# Altium PCB DEV BOARD PCB.PcbDoc (part 1 of 2)
Units mil, origin at the board's own origin, x right, y up, seen from the top; angles counter-clockwise.
Board outline 4844 x 4603 mil, 2 copper layers (Top Layer, Bottom Layer); 78 components, 97 nets, 348 pads, 240 vias.
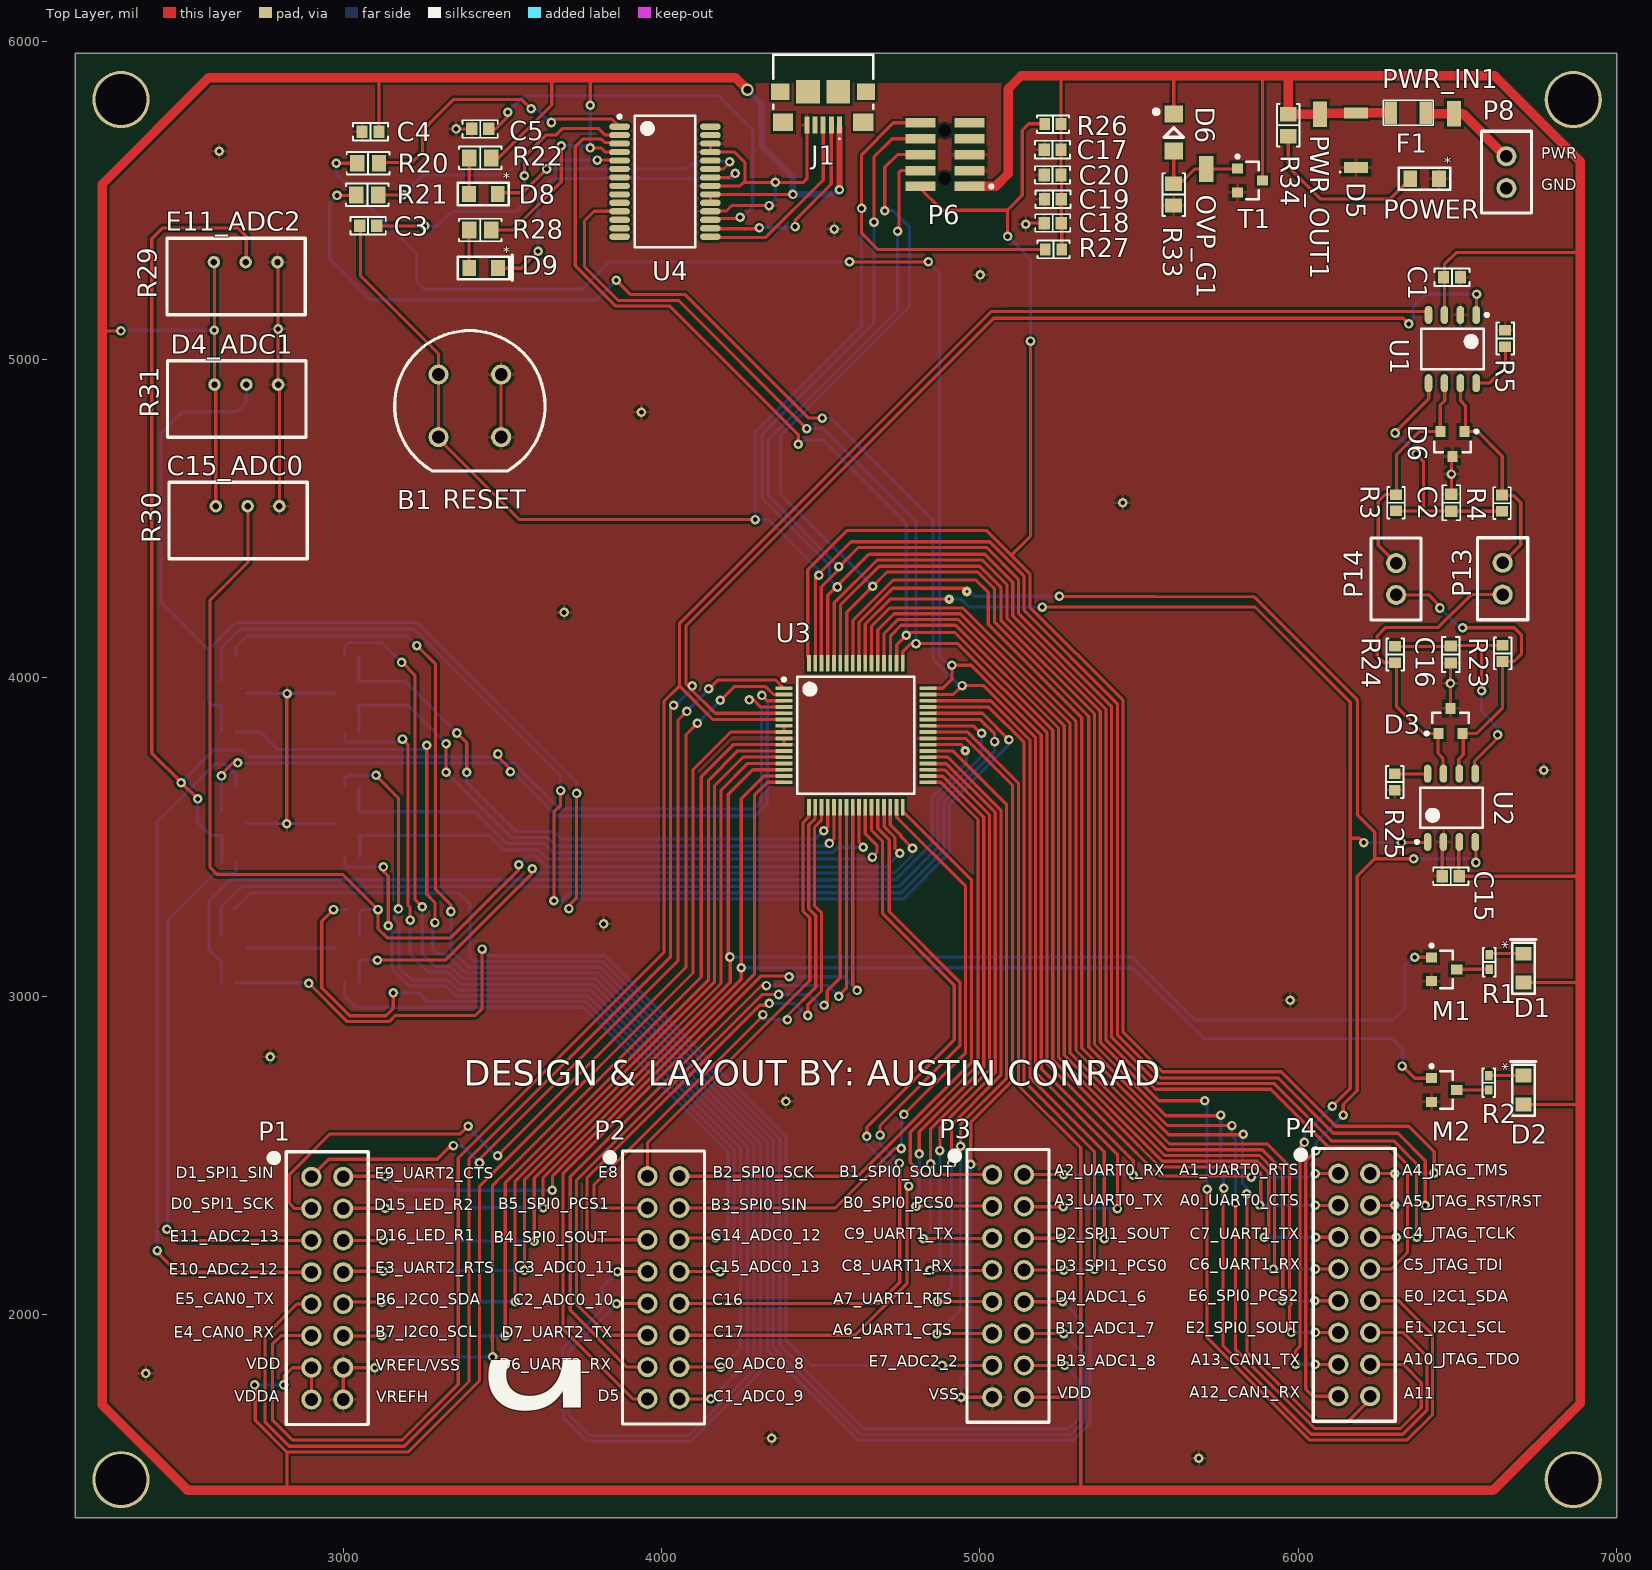
[diagram p0: Top Layer view]
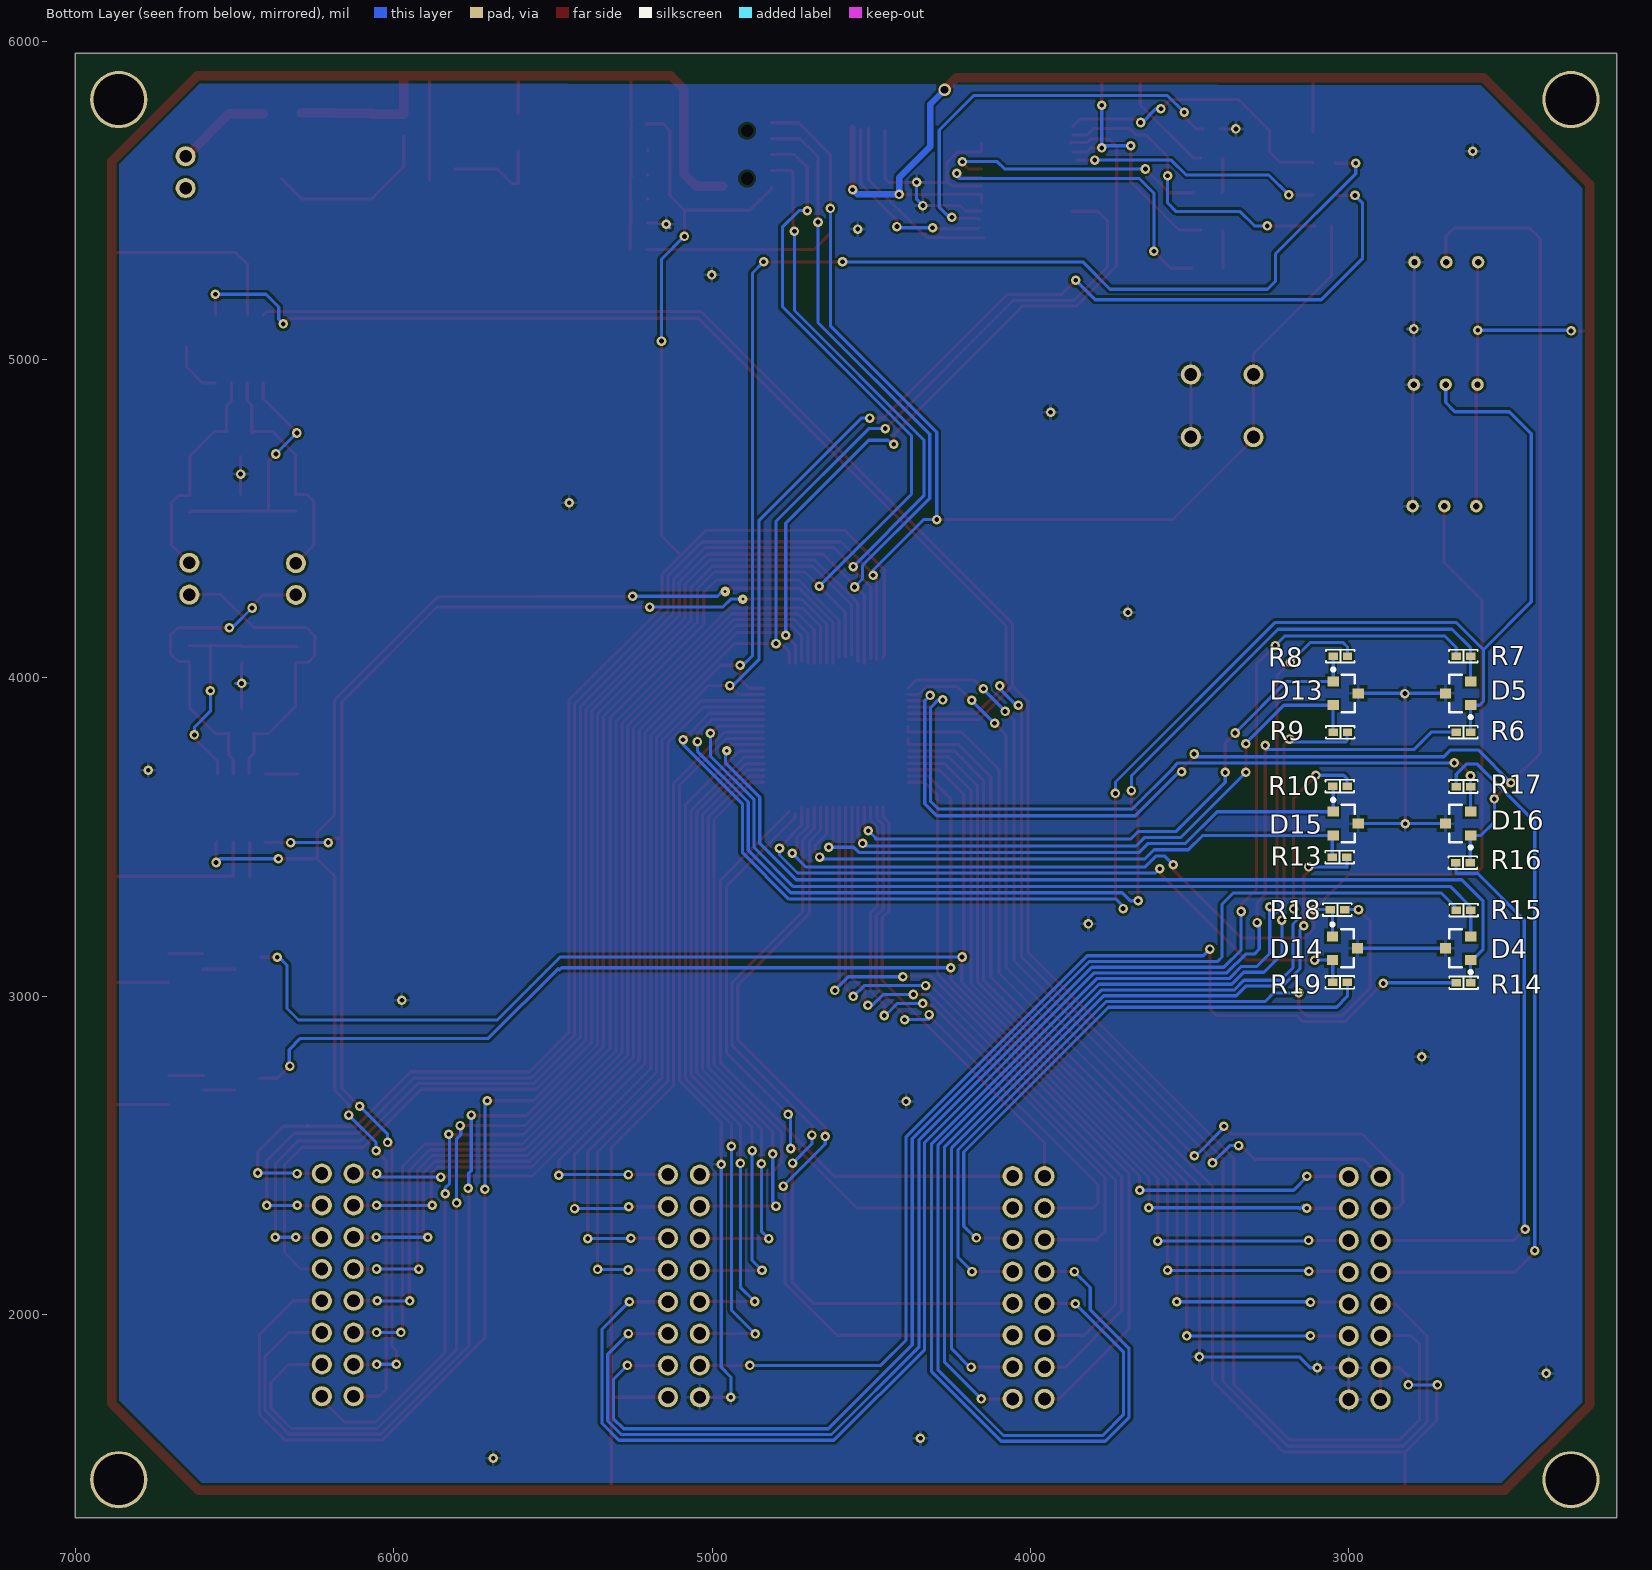
[diagram p1: Bottom Layer view, seen from below]

## Layer stack, top to bottom
Top Solder: solder mask 0.4, Solder Resist, Dk 3.5
Top Layer: signal copper 1.4
Dielectric 1: dielectric 12.6, FR-4, Dk 4.8
Bottom Layer: signal copper 1.4
Bottom Solder: solder mask 0.4, Solder Resist, Dk 3.5

## Board outline
2157,1360 7001,1360 7001,5963 2157,5963
cut-out: 1720,8231
cut-out: 6271.66,2594.85

## Design rules (kind name [scope] priority, off if disabled: settings)
Clearance [All] p1: gap=8 ignorepadtopadclearanceinfootprint=FALSE
PolygonConnect [All] p1: connectstyle=Relief reliefconductorwidth=10 reliefentries=4 polygonreliefangle="90 Angle" airgapwidth=10
RoutingVias [All] p1: holewidth=15 width=30 viastyle="Through Hole" minholewidth=15 minwidth=15 maxholewidth=30 maxwidth=50
SolderMaskExpansion [All] p1: expansion=4
Width [All] p1: maxlimit=60 minlimit=10 preferedwidth=10 minimp=50.000000 maximp=50.000000 favimp=50.000000 checkconnectedcopper=TRUE
30 further rules are at their usual default settings.

## Classes and differential pairs
component class U_RVP_OVP_LC: D5 D6 OVP_G1 POWER PWR_IN1 PWR_OUT1 R33 R34 T1
component class U_MCU_MKE185F512VLH16: B1 C3 C4 C5 C17 C18 C19 C20 D8 D9 J1 P6 P8 R20 R21 R22 R26 R27 R28 R29 R30 R31 U3 U4
component class U_HVP_ADC_CONNECTIONS: D4 D5 D13 D14 D15 D16 R6 R7 R8 R9 R10 R13 R14 R15 R16 R17 R18 R19
component class "U_Header Pinout": P1 P2 P3 P4
component class U_CAN_Tranceiver: C1 C2 C15 C16 D3 D6 P13 P14 R3 R4 R5 R23 R24 R25 U1 U2
component class "DEV Board": D1 D2 F1 M1 M2 R1 R2

## Components (designator, comment, footprint, x,y, rotation, side; value= is the part's Value field where it differs from the comment)
B1 "KS-01Q-01" KS-01Q-01 3298.15,4757.15 r0 top value=NULL
C1 "Capacitor MLCC 0.10uf 50V CAP 0603/1608" "CAP 0603/1608" 6484,5260 r180 top value=0.10uf
C2 "Capacitor MLCC 4700pf 50V CAP 0603/1608" "CAP 0603/1608" 6482.07,4550.78 r270 top value=4700pf
C3 "Capacitor MLCC 0.10uf 25V CAP 0603/1608" "CAP 0603/1608" 3077.03,5421.02 r180 top value=0.10uf
C4 "Capacitor MLCC 0.10uf 25V CAP 0603/1608" "CAP 0603/1608" 3084.55,5717.24 r0 top value=0.10uf
C5 "Capacitor MLCC 0.10uf 25V CAP 0603/1608" "CAP 0603/1608" 3429.15,5725.7 r0 top value=0.10uf
C15 "Capacitor MLCC 0.10uf 50V CAP 0603/1608" "CAP 0603/1608" 6480.07,3376.78 r0 top value=0.10uf
C16 "Capacitor MLCC 4700pf 50V CAP 0603/1608" "CAP 0603/1608" 6480.07,4073.78 r90 top value=4700pf
C17 "Capacitor MLCC 0.10uf 16V CAP 0603/1608" "CAP 0603/1608" 5228.43,5661 r0 top value=0.10uf
C18 "Capacitor MLCC 0.10uf 25V CAP 0603/1608" "CAP 0603/1608" 5228.96,5430.08 r0 top value=0.10uf
C19 "Capacitor MLCC 100pf 25V CAP 0603/1608" "CAP 0603/1608" 5229.44,5504.46 r0 top value=100pf
C20 "Capacitor MLCC 0.10uf 25V CAP 0603/1608" "CAP 0603/1608" 5228.43,5581 r0 top value=0.10uf
D1 "LED" 0805_LED 6708.47,3088.18 r90 top value=Red
D2 "LED" 0805_LED 6708.47,2704.95 r90 top value=Red
D3 "NUP1105LT1G" "SOT-23 (TO-236)" 6479,3865 r90 top value=TVS_24V
D4 "AZ23C4V7-7-F Dual Zenner Diodes" SOT23-3 2654.94,3150.42 r0 bottom value=4.7V
D5 "DIODE" SOD-128 6182,5690 r90 top value=5A
D5 "AZ23C4V7-7-F Dual Zenner Diodes" SOT23-3 2654.94,3951.86 r0 bottom value=4.7V
D6 "DDZ9701-7" SOD123F 5609,5714.93 r90 top value=14Vz
D6 "NUP1105LT1G" "SOT-23 (TO-236)" 6485.6,4735.63 r270 top value=TVS_24V
D8 "LED" 0805_LED 3439.3,5521.24 r0 top value=Green
D9 "LED" 0805_LED 3439.72,5289 r0 top value=Red
D13 "AZ23C4V7-7-F Dual Zenner Diodes" SOT23-3 3008.16,3951.86 r180 bottom value=4.7V
D14 "AZ23C4V7-7-F Dual Zenner Diodes" SOT23-3 3010.69,3150.42 r180 bottom value=4.7V
D15 "AZ23C4V7-7-F Dual Zenner Diodes" SOT23-3 3008.16,3542.21 r180 bottom value=4.7V
D16 "AZ23C4V7-7-F Dual Zenner Diodes" SOT23-3 2654.94,3542.21 r0 bottom value=4.7V
F1 "2.2A" "PTC Fuse 1206/3216" 6346.12,5776 r180 top
J1 "1981568-1" TECO-1981568-5_V 4507.24,5737.69 r180 top value=CONN
M1 "DMG2302UK-7" SOT23-3 6459,3084.24 r0 top value=N_Channel
M2 "DMG2302UK-7" SOT23-3 6459,2704.95 r0 top value=N_Channel
OVP_G1 "RCU-0C" RCU-0C 5712,5600 r180 top
P1 "PPTC082LFBN-RC" PPTC082LFBN-RC 2898.53,2432.09 r270 top value=CONN
P2 "PPTC082LFBN-RC" PPTC082LFBN-RC 3955.06,2433.96 r270 top value=CONN
P3 "PPTC082LFBN-RC" PPTC082LFBN-RC 5038.54,2439.06 r270 top value=CONN
P4 "PPTC082LFBN-RC" PPTC082LFBN-RC 6126.66,2442.29 r270 top value=CONN
P6 "5103309-1" HDR2X5_SMT 4890,5645 r90 top value=CONN
P8 "M20-9990246" M20-9990246 6655,5540 r270 top value=CONN
P13 "M20-9990246" M20-9990246 6643,4262 r270 top value=CONN
P14 "M20-9990246" M20-9990246 6308,4261 r270 top value=CONN
POWER "LED" 0805_LED 6398,5569 r0 top value=Green (schematic designator POWER1)
PWR_IN1 "RCU-0C" RCU-0C 6490,5774 r180 top
PWR_OUT1 "RCU-0C" RCU-0C 6069,5772 r180 top
R1 "Resistor 220 0402 1/10W 1%" "RES 0402/1005" 6600.99,3106.88 r90 top value=220
R2 "Resistor 220 0402 1/10W 1%" "RES 0402/1005" 6599.44,2727.59 r90 top value=220
R3 "Resistor 62 0603 1/10W 5%" "RES 0603/1608" 6307.7,4550.78 r270 top value=62
R4 "Resistor 62 0603 1/10W 5%" "RES 0603/1608" 6641.07,4549.37 r90 top value=62
R5 "Resistor 100 0603 1/10W 10%" "RES 0603/1608" 6651,5067 r270 top value=100
R6 "Resistor 2.2k 0402 1/10W 1%" "RES 0402/1005" 2638.31,3829.86 r0 bottom value=2.2k
R7 "Resistor 2.2k 0402 1/10W 1%" "RES 0402/1005" 2638.31,4068.86 r0 bottom value=2.2k
R8 "Resistor 2.2k 0402 1/10W 1%" "RES 0402/1005" 3025.16,4068.86 r180 bottom value=2.2k
R9 "Resistor 2.2k 0402 1/10W 1%" "RES 0402/1005" 3025.16,3828.86 r180 bottom value=2.2k
R10 "Resistor 2.2k 0402 1/10W 1%" "RES 0402/1005" 3026.64,3660 r180 bottom value=2.2k
R13 "Resistor 2.2k 0402 1/10W 1%" "RES 0402/1005" 3027.64,3437 r180 bottom value=2.2k
R14 "Resistor 2.2k 0402 1/10W 1%" "RES 0402/1005" 2637.67,3041.95 r0 bottom value=2.2k
R15 "Resistor 2.2k 0402 1/10W 1%" "RES 0402/1005" 2637.67,3270.42 r0 bottom value=2.2k
R16 "Resistor 2.2k 0402 1/10W 1%" "RES 0402/1005" 2639.64,3419.82 r0 bottom value=2.2k
R17 "Resistor 2.2k 0402 1/10W 1%" "RES 0402/1005" 2638.2,3658.82 r0 bottom value=2.2k
R18 "Resistor 2.2k 0402 1/10W 1%" "RES 0402/1005" 3034.43,3272.02 r180 bottom value=2.2k
R19 "Resistor 2.2k 0402 1/10W 1%" "RES 0402/1005" 3026.29,3043.05 r180 bottom value=2.2k
R20 "Resistor 1.0k 0805 1/4W 1%" "RES 0805/2012" 3076.68,5617.87 r180 top value=1.0k
R21 "Resistor 1.0k 0805 1/4W 1%" "RES 0805/2012" 3074.59,5518.49 r180 top value=1.0k
R22 "Resistor 1.0k 0805 1/4W 1%" "RES 0805/2012" 3429.15,5634.71 r0 top value=1.0k
R23 "Resistor 62 0603 1/10W 5%" "RES 0603/1608" 6643,4077.41 r90 top value=62
R24 "Resistor 62 0603 1/10W 5%" "RES 0603/1608" 6305.07,4073.78 r270 top value=62
R25 "Resistor 100 0603 1/10W 10%" "RES 0603/1608" 6304,3673 r90 top value=100
R26 "Resistor 10k 0603 1/10W 1%" "RES 0603/1608" 5229.41,5741 r0 top value=10k
R27 "Resistor 10k 0603 1/10W 5%" "RES 0603/1608" 5231.4,5346.98 r0 top value=10k
R28 "Resistor 1.0k 0805 1/4W 1%" "RES 0805/2012" 3429.15,5408.16 r0 top value=1.0k
R29 "3299X-1-502LF" 3299X-1-502LF 2692,5307 r270 top value=5K
R30 "3299X-1-502LF" 3299X-1-502LF 2698,4540 r270 top value=5K
R31 "3299X-1-502LF" 3299X-1-502LF 2694,4922 r270 top value=5K
R33 "Resistor 47k 0805 1/10W 1%" "RES 0805/2012" 5609,5519.55 r90 top value=47k
R34 "Resistor 470 0805 1/10W 1%" "RES 0805/2012" 5969,5737.55 r90 top value=470
T1 "DMG2302UK-7" SOT23-3 5849,5564 r0 top value=N_Channel
U1 "MCP2561 CAN Transceiver" SOIC-8 6485,5034 r270 top value=CAN/UART
U2 "MCP2561 CAN Transceiver" SOIC-8 6482,3592 r90 top value=CAN/UART
U3 "MKE18F512 VLH16 MCU" TQFP64 4610,3820 r0 top
U4 "FT232RL" SSOP-28 4010,5560 r0 top

## Footprints (in the part's own frame and the unit in brackets; to place one, negate y for a bottom-side part, rotate by r counter-clockwise, add the part's x,y. Pads: shape width x height; smd on the part's side, far side on the other; paste and mask are expansions set on the pad)
0805_LED [mm]
  rect 1.1x1.3 smd: 1(-1.15,0) 2(1.15,0)
  silkscreen extent -2.06,-1.02 2.29,1.02, body extent -1.05,-0.67 1.05,0.68, height 0.9
3299X-1-502LF [mm]
  round 1 hole 0.51: 1(0,-2.54) 2(0,0) 3(0,2.54)
  silkscreen extent -1.91,-6.29 4.19,4.76, body extent -1.91,-6.29 4.19,4.76, height 10.05
"CAP 0603/1608" [mm] "Chip Capacitor, 2-Leads, Body 1.60x0.80mm, IPC Medium Density"
  rect 0.9x1 smd: 1(-0.675,0) 2(0.675,0)
  silkscreen extent -1.4,-0.7 1.4,0.7, body extent -0.8,-0.41 0.8,0.41, height 0.82
HDR2X5_SMT [mm] "Header, 10-Leads, Body 3.43x6.35mm, Pitch 1.27mm"
  rect 0.76x2.4 smd: 1(-2.54,-1.95) 2(-2.54,1.95) 3(-1.27,-1.95) 4(-1.27,1.95) 5(0,-1.95) 6(0,1.95) 7(1.27,-1.95) 8(1.27,1.95) 9(2.54,-1.95) 10(2.54,1.95)
  round 0 hole 1 unplated: MH1(-1.905,0) MH2(1.905,0)
  silkscreen extent -2.66,-3.83 -2.42,-3.58, body extent -3.17,-1.72 3.17,1.72, height 4.55
KS-01Q-01 [mm]
  round 1.6 hole 1.02: 1(0,0) 2(5,0) 3(0,5) 4(5,5)
  silkscreen extent -3.5,-2.7 8.5,8.5, body extent -3.5,-3.5 8,8.5, height 14.36
M20-9990246 [mm]
  round 1.6 hole 1: 1(-2.54,0) 2(0,0)
  silkscreen extent -4.54,-2 2,2
PPTC082LFBN-RC [mm] "2x8 header female"
  round 1.6 hole 1.02: 1(0,0) 2(2.54,0) 3(5.08,0) 4(7.62,0) 5(10.16,0) 6(12.7,0) 7(15.24,0) 8(17.78,0) 9(17.78,2.54) 10(15.24,2.54) 11(12.7,2.54) 12(10.16,2.54) 13(7.62,2.54) 14(5.08,2.54) 15(2.54,2.54) 16(0,2.54)
  silkscreen extent -2,-3.07 19.78,4.54, body extent -1.3,-1.2 19.52,3.8, height 8.5
"PTC Fuse 1206/3216" [mm]
  rect 1x1.8 smd: 1(-1.4,0) 2(1.4,0)
  silkscreen extent -2,-1 2,1, body extent -1.75,-1 1.75,1, height 1
RCU-0C [mm]
  rect 1.15x2.05 smd: 1(0,0)
  body extent -0.6,-0.77 0.6,0.82, height 1.16
"RES 0402/1005" [mm] "Chip Resistor, 2-Leads, Body 1.0x0.5mm, IPC Medium Density"
  rect 0.75x0.6 smd: 1(-0.575,0) 2(0.575,0)
  silkscreen extent -1.14,-0.51 1.14,0.51, body extent -0.5,-0.25 0.5,0.25, height 0.35
"RES 0603/1608" [mm] "Chip Resistor, 2-Leads, Body 1.60x0.80mm, IPC Medium Density"
  rect 0.85x0.95 smd: 1(-0.65,0) 2(0.65,0)
  silkscreen extent -1.27,-0.7 1.27,0.7, body extent -0.8,-0.4 0.8,0.4, height 0.45
"RES 0805/2012" [mm] "Chip Resistor, 2-Leads, Body 2.00x1.25mm, IPC Medium Density"
  rect 1.15x1.35 smd: 1(-0.875,0) 2(0.875,0)
  silkscreen extent -1.7,-0.9 1.7,0.9, body extent -0.95,-0.62 1.05,0.63, height 0.6
SOD123F [mm] "SODFL, 2-Leads, Body 1.80x3.50mm, IPC Low Density"
  rect 1.35x1.45 smd: 1(-1.475,0) 2(1.475,0)
  silkscreen extent -0.38,-0.76 1.75,1.5, body extent -1.75,-0.95 1.75,0.95, height 1.15
SOD-128 [mm] "SOD-128, 2-Leads, Body 2.40x4.70mm, IPC Medium Density"
  rect 0.9x1.9 smd: 1(-2.175,0) 2(2.175,0)
  silkscreen extent -2.57,1.2 -2.48,1.3, body extent -2.35,-1.25 2.35,1.25, height 0.85
SOIC-8 [mm] "SOIC, 8-Leads, Body 4.90x3.90mm, Pitch 1.27mm, IPC Medium Density"
  oval 1.45x0.6 smd: 1(-2.725,1.905) 2(-2.725,0.635) 3(-2.725,-0.635) 4(-2.725,-1.905) 5(2.725,-1.905) 6(2.725,-0.635) 7(2.725,0.635) 8(2.725,1.905)
  silkscreen extent -2.85,-2.5 1.6,2.88, body extent -3,-2.5 3,2.5, height 1.75
SOT23-3 [mm] "SOT23, 3-Leads, Body 2.92x2.37mm, Pitch 0.95mm, IPC Medium Density, NUP2105L"
  rect 0.9x0.8 smd: 1(-1,0.95) 2(-1,-0.95) 3(1,0)
  silkscreen extent -1.12,-1.5 0.7,2.02, body extent -0.7,-1.52 0.7,1.52, height 1.11
"SOT-23 (TO-236)" [mm]
  rect 0.9x0.8 smd: 1(-1,0.95) 2(-1,-0.95) 3(1,0)
  silkscreen extent -1.12,-1.46 0.65,2.02, body extent -0.65,-1.46 0.65,1.46, height 1.11
SSOP-28 [mm] "SOP68P780X200-28N ,SOP, 28-Leads, Body 10.20x5.30mm, Pitch 0.68mm, IPC Medium Density, FT232RL"
  oval 1.65x0.5 smd: 1(-3.625,4.394) 2(-3.625,3.718) 3(-3.625,3.042) 4(-3.625,2.366) 5(-3.625,1.69) 6(-3.625,1.014) 7(-3.625,0.338) 8(-3.625,-0.338) 9(-3.625,-1.014) 10(-3.625,-1.69) 11(-3.625,-2.366) 12(-3.625,-3.042) 13(-3.625,-3.718) 14(-3.625,-4.394) 15(3.625,-4.394) 16(3.625,-3.718) 17(3.625,-3.042) 18(3.625,-2.366) 19(3.625,-1.69) 20(3.625,-1.014) 21(3.625,-0.338) 22(3.625,0.338) 23(3.625,1.014) 24(3.625,1.69) 25(3.625,2.366) 26(3.625,3.042) 27(3.625,3.718) 28(3.625,4.394)
  silkscreen extent -3.75,-5.25 2.4,5.32, body extent -2.8,-5.25 2.8,5.25, height 2
TECO-1981568-5_V [mm] "SMD, 5-Leads, Body 8x5.9mm, Pitch 0.65mm"
  rect 0.4x1.35 smd: 1(-1.3,0) 2(-0.65,0) 3(0,0) 4(0.65,0) 5(1.3,0)
  rect 1.6x1.4 smd: 6(-3.2,-0.225) 7(3.2,-0.225)
  rect 1.45x1.3 smd: 8(-3.425,-2.675) 9(3.425,-2.675)
  rect 1.9x1.9 smd: 10(-1.2,-2.675) 11(1.2,-2.675)
  silkscreen extent -4,-5.63 4,1.12, body extent -4,-5.5 4,0.1, height 2.79
TQFP64 [mm] "TSQFP, 64-Leads, Body 10.00x10.00mm, Pitch 0.50mm, IPC Medium Density, MKE18F512VLH16"
  rect 1.35x0.3 smd: 1(-5.75,3.75) 2(-5.75,3.25) 3(-5.75,2.75) 4(-5.75,2.25) 5(-5.75,1.75) 6(-5.75,1.25) 7(-5.75,0.75) 8(-5.75,0.25) 9(-5.75,-0.25) 10(-5.75,-0.75) 11(-5.75,-1.25) 12(-5.75,-1.75) 13(-5.75,-2.25) 14(-5.75,-2.75) 15(-5.75,-3.25) 16(-5.75,-3.75) 33(5.75,-3.75) 34(5.75,-3.25) 35(5.75,-2.75) 36(5.75,-2.25) 37(5.75,-1.75) 38(5.75,-1.25) 39(5.75,-0.75) 40(5.75,-0.25) 41(5.75,0.25) 42(5.75,0.75) 43(5.75,1.25) 44(5.75,1.75) 45(5.75,2.25) 46(5.75,2.75) 47(5.75,3.25) 48(5.75,3.75)
  rect 0.3x1.35 smd: 17(-3.75,-5.75) 18(-3.25,-5.75) 19(-2.75,-5.75) 20(-2.25,-5.75) 21(-1.75,-5.75) 22(-1.25,-5.75) 23(-0.75,-5.75) 24(-0.25,-5.75) 25(0.25,-5.75) 26(0.75,-5.75) 27(1.25,-5.75) 28(1.75,-5.75) 29(2.25,-5.75) 30(2.75,-5.75) 31(3.25,-5.75) 32(3.75,-5.75) 49(3.75,5.75) 50(3.25,5.75) 51(2.75,5.75) 52(2.25,5.75) 53(1.75,5.75) 54(1.25,5.75) 55(0.75,5.75) 56(0.25,5.75) 57(-0.25,5.75) 58(-0.75,5.75) 59(-1.25,5.75) 60(-1.75,5.75) 61(-2.25,5.75) 62(-2.75,5.75) 63(-3.25,5.75) 64(-3.75,5.75)
  silkscreen extent -5.87,-4.67 4.67,4.68, body extent -5,-5 5,5, height 1.6

## Part data
B1: library part 7, "RESET button", Manufacturer_id=1, Package=NULL, Supplier1PartNo=EG4791-ND, Voltage_Rating=Null, ComponentLink1Description=null, ComponentLink1URL=Null, Created_By=Austin, Created_Date=12/15/2018, Drawer_id=1, idTable=7, Link=https://www.digikey.com/product-detail/en/e-switch/KS-01Q-01/EG4791-ND/2116270, MfrPartNo=KS-01Q-01, Name=KS-01Q-01, Num_Contacts=4, Num_Rows=2, Pitch=5, Supplier1=e-switch, Updated_By=Null
C1 C15: library part 943, Dielectric=Ceramic, Manufacturer_id=1, Package="CAP 0603/1608", Voltage_Rating=50V, Created_By="Nick Mah", Created_Date=10/20/2018, Drawer_id=1, idCapacitor=943, Name="Cap_0.10uf_50V_CAP 0603/1608"
C2 C16: library part 929, Dielectric=Ceramic, Manufacturer_id=1, Package="CAP 0603/1608", Voltage_Rating=50V, Created_By="Nick Mah", Created_Date=10/20/2018, Drawer_id=1, idCapacitor=929, Name="Cap_4700pf_50V_CAP 0603/1608"
C3 C4 C5 C18 C20: library part 583, Dielectric=Ceramic, Manufacturer_id=1, Package="CAP 0603/1608", Voltage_Rating=25V, Created_By="Nick Mah", Created_Date=10/20/2018, Drawer_id=1, idCapacitor=583, Name="Cap_0.10uf_25V_CAP 0603/1608"
C17: library part 223, Dielectric=Ceramic, Manufacturer_id=1, Package="CAP 0603/1608", Voltage_Rating=16V, Created_By="Nick Mah", Created_Date=10/20/2018, Drawer_id=1, idCapacitor=223, Name="Cap_0.10uf_16V_CAP 0603/1608"
C19: library part 529, Dielectric=Ceramic, Manufacturer_id=1, Package="CAP 0603/1608", Voltage_Rating=25V, Created_By="Nick Mah", Created_Date=10/20/2018, Drawer_id=1, idCapacitor=529, Name="Cap_100pf_25V_CAP 0603/1608"
D1 D2 D9: library part 1, Package=0805, Drawer_id=1, idLED=1, Manufacturer_id=1, Name=LED_0805_RED, Vf=0.7V
D3 D6: library part 7, "ESD Protection Diode", Manufacturer_id=1, Package=SOT-23, Power=350W, Supplier1PartNo=NUP1105LT1GOSCT-ND, ComponentLink1URL=https://www.digikey.com/product-detail/en/on-semiconductor/NUP1105LT1G/NUP1105LT1GOSCT-ND/2122067, Drawer_id=1, Ic=8A, idDiode=7, Link=https://www.digikey.com/product-detail/en/on-semiconductor/NUP1105LT1G/NUP1105LT1GOSCT-ND/2122067, MfrPartNo=NUP1105LT1G, Name=SOT-23_350W_Zener, Num_Circuits=1, Supplier1=Digikey, Type=Zener
D4 D5 D13 D14 D15 D16: library part 14, "DIODE ZENER ARRAY 4.7V SOT23-3", Manufacturer_id=1, MfrPartNo=AZ23C4V7-7-F, Package=SOT23-3, Power=300mW, Created_By="Angel Delgado", Drawer_id=1, idDiode=14, Link=https://www.digikey.com/product-detail/en/diodes-incorporated/AZ23C4V7-7-F/AZ23C4V7-FDICT-ND/815309, Name=AZ23C4V7-7-F, Num_Circuits=2, Supplier1=Digi-Key, Type="Zener Array"
D5: library part 12, "DIODE SCHOTTKY 30V 5A TMINIP2", Manufacturer_id=1, MfrPartNo=DB2431200L, Package=SOD-128, Power=30V, Supplier1PartNo=DB2431200LCT-ND, ComponentLink1Description=Datasheet, ComponentLink1URL=https://industrial.panasonic.com/content/data/SC/ds/ds4/DB2431200L_E.pdf, Drawer_id=1, Ic=5A, idDiode=12, Link=https://www.digikey.com/product-detail/en/panasonic-electronic-components/DB2431200L/DB2431200LCT-ND/3884430, Name=DB2431200L, Num_Circuits=1, Supplier1=Digi-Key, Type=Schottky
D6: library part 10, "Zener Diode 14V 500mW ±5% Surface Mount SOD-123", Manufacturer_id=8, Package=SOD-123, Power=500mW, Supplier1PartNo=DDZ9701-7DICT-ND, ComponentLink1Description=Datasheet, ComponentLink1URL=https://www.diodes.com/assets/Datasheets/ds30410.pdf, Drawer_id=1, idDiode=10, Link=https://www.digikey.com/product-detail/en/diodes-incorporated/DDZ9701-7/DDZ9701-7DICT-ND/3877402, MfrPartNo=DDZ9701-7, Name=DDZ9701, Num_Circuits=1, Supplier1=Digi-Key, Type=Zener
D8 POWER: library part 2, Manufacturer_id=1, Package=0805, Brightness=7mcd, Drawer_id=1, Id=20mA, idLED=2, Link=https://www.digikey.com/product-detail/en/visual-communications-company-vcc/CMD17-21VGD-TR8/L62505CT-ND/254936, Name=CMD17_0805_GREEN, Vf=2.1V
F1: library part 8, "Fuse", Manufacturer_id=1, MfrPartNo=1206L110/12SLYR, Drawer_id=1, I_hold=1.1A, I_max=50A, I_trip=2.2A, idFuse=8, LatestRevisionDate=17-Jul-2002, LatestRevisionNote="Re-released for DXP Platform.", Link=https://www.digikey.com/product-detail/en/littelfuse-inc/1206L110-12SLYR/F5764CT-ND/3593809, Name=Resettable, PackageDescription="Thru-Hole; 2 Leads", PackageReference=PIN-W2/E2.8, Pd_Typ=.8W, Published=8-Jun-2000, Publisher="Altium Limited", V_max=12V
J1: library part 5, "USB Micro Type B", Manufacturer_id=1, ComponentLink1Description=Datasheet, Created_By=Aiku, Created_Date=10/20/2018, Drawer_id=1, idConn=5, Link=https://www.mouser.com/ProductDetail/TE-Connectivity-AMP/1981568-1?qs=sGAEpiMZZMulM8LPOQ%252bykzEIUPbUCiSfqsfxH3Oq%252bYo%3d, MfrPartNo=1981568-1, Name="TE USB Micro", Num_Contacts=5, Supplier1=TE
M1 M2 T1: library part 6, "MOSFET N-CHANNEL 30V 5A SOT23", Manufacturer_id=1, Package=SOT-23, Created_By=Angel, Drawer_id=1, Id=2.8A, idFETs=6, Link=https://www.digikey.com/product-detail/en/diodes-incorporated/DMG2302UK-7/DMG2302UK-7DICT-ND/6010163, MfrPartNo=DMG2302UK-7, Name=DMG2302UK-7, Num_Circuits=1, Rds_On=90mOhm, Supplier1=Digi-Key, Vdss=20V, Vgs(Max)=1V, Vgs(typ)=800mV
OVP_G1 PWR_IN1 PWR_OUT1: library part 5, Manufacturer_id=1, Package=0603, ComponentLink1Description=Datasheet, ComponentLink1URL=https://www.te.com/commerce/DocumentDelivery/DDEController?Action=srchrtrv&DocNm=1773266&DocType=DS&DocLang=English, Drawer_id=1, idTable=5, Link=https://www.digikey.com/product-detail/en/te-connectivity-amp-connectors/RCU-0C/A106145CT-ND/3477802, MfrPartNo=RCU-0C, Name=RCU-0C_Test_Point
P1 P2 P3 P4: library part 23, "2x8 female header", Manufacturer_id=1, Package=Conn, Supplier1PartNo=S7076-ND, Voltage_Rating=V, ComponentLink1Description=Null, ComponentLink1URL=Null, Created_By=Austin, Created_Date=12/15/2018, Drawer_id=1, idConn=23, Link=https://www.digikey.com/product-detail/en/sullins-connector-solutions/PPTC082LFBN-RC/S7076-ND/810214, MfrPartNo=PPTC082LFBN-RC, Name=PPTC082LFBN-RC, Num_Contacts=16, Num_Rows=2, Pitch=2.54, Supplier1=Digi-Key, Updated_By=Null
P6: library part 4, "2 row connector", Manufacturer_id=1, Voltage_Rating=None, ComponentLink1Description=Datasheet, Created_By=Aiku, Drawer_id=1, idConn=4, Link=https://www.digikey.com/product-detail/en/5103309-1/A33160-ND/1114898?utm_campaign=buynow&WT.z_cid=ref_octopart_dkc_buynow&utm_medium=aggregator&curr=usd&site=us&utm_source=octopart, MfrPartNo=5103309-1, Name=CONN_TE_2X5POS, Num_Contacts=10, Num_Rows=2, Pitch=2.54mm
P8 P13 P14: library part 25, "2 Pin VCC Power Header, Male", Manufacturer_id=1, Package=Conn, Supplier1PartNo=952-2262-ND, Voltage_Rating=Null, ComponentLink1Description=Null, ComponentLink1URL=https://www.digikey.com/product-detail/en/harwin-inc/M20-9990246/952-2262-ND/3728226, Created_By=Austin, Created_Date=12/15/2018, Drawer_id=1, idConn=25, Link=https://www.digikey.com/product-detail/en/harwin-inc/M20-9990246/952-2262-ND/3728226, MfrPartNo=M20-9990246, Name=M20-9990246, Num_Contacts=2, Num_Rows=Null, Pitch=2.54, Supplier1=Digi-Key, Updated_By=Null
R1 R2: library part 57, Manufacturer_id=1, Package=0402, Power=1/10W, Tolerance=1%, ComponentLink1Description=Datasheet, Created_By="Nick Mah", Created_Date=2018-10-20, Drawer_id=1, idResistor=57, Name=Res_220_0402_1/10W_1%, Supplier 1=Digi-Key
R3 R4 R23 R24: library part 1340, Manufacturer_id=1, Package=0603, Power=1/10W, Tolerance=5%, ComponentLink1Description=Datasheet, Created_By="Nick Mah", Created_Date=2018-10-20, Drawer_id=1, idResistor=1340, Name=Res_62_0603_1/10W_5%, Supplier 1=Digi-Key
R5 R25: library part 2293, Manufacturer_id=1, Package=0603, Power=1/10W, Tolerance=10%, ComponentLink1Description=Datasheet, Created_By="Nick Mah", Created_Date=2018-10-20, Drawer_id=1, idResistor=2293, Name=Res_100_0603_1/10W_10%, Supplier 1=Digi-Key
R6 R7 R8 R9 R10 R13 R14 R15 R16 R17 R18 R19: library part 81, Manufacturer_id=1, Package=0402, Power=1/10W, Tolerance=1%, ComponentLink1Description=Datasheet, Created_By="Nick Mah", Created_Date=2018-10-20, Drawer_id=1, idResistor=81, Name=Res_2.2k_0402_1/10W_1%, Supplier 1=Digi-Key
R20 R21 R22 R28: library part 721, Manufacturer_id=1, Package=0805, Power=1/4W, Tolerance=1%, ComponentLink1Description=Datasheet, Created_By="Nick Mah", Created_Date=2018-10-20, Drawer_id=1, idResistor=721, Name=Res_1.0k_0805_1/4W_1%, Supplier 1=Digi-Key
R26: library part 313, Manufacturer_id=1, Package=0603, Power=1/10W, Tolerance=1%, ComponentLink1Description=Datasheet, Created_By="Nick Mah", Created_Date=2018-10-20, Drawer_id=1, idResistor=313, Name=Res_10k_0603_1/10W_1%, Supplier 1=Digi-Key
R27: library part 1393, Manufacturer_id=1, Package=0603, Power=1/10W, Tolerance=5%, ComponentLink1Description=Datasheet, Created_By="Nick Mah", Created_Date=2018-10-20, Drawer_id=1, idResistor=1393, Name=Res_10k_0603_1/10W_5%, Supplier 1=Digi-Key
R29 R30 R31: library part 6, Manufacturer_id=1, ComponentLink1Description=Datasheet, Drawer_id=1, idTable=6, Link=https://www.digikey.com/product-detail/en/bourns-inc/3299X-1-502LF/3299X-502LF-ND/1088167, MfrPartNo=3299X-1-502LF, Name=3299X-1-502LF, Num_Contacts=3, Pitch=2.54mm
R33: library part 545, Manufacturer_id=1, Package=0805, Power=1/10W, Tolerance=1%, ComponentLink1Description=Datasheet, Created_By="Nick Mah", Created_Date=2018-10-20, Drawer_id=1, idResistor=545, Name=Res_47k_0805_1/10W_1%, Supplier 1=Digi-Key
R34: library part 497, Manufacturer_id=1, Package=0805, Power=1/10W, Tolerance=1%, ComponentLink1Description=Datasheet, Created_By="Nick Mah", Created_Date=2018-10-20, Drawer_id=1, idResistor=497, Name=Res_470_0805_1/10W_1%, Supplier 1=Digi-Key
U1 U2: library part 5, Manufacturer_id=1, MfrPartNo=MCP2561, Package=SOIC-8, Created_By="Angel Delgado", Data_Rate=1Mbps, Drawer_id=1, idIC_Interface=5, Link=https://www.digikey.com/product-detail/en/microchip-technology/MCP2561T-E-SN/MCP2561T-E-SNCT-ND/5148846, Name="CAN Transceiver", Num_Circuits=1, Protocol=CAN, Type=Transceiver, Vin(Max)=5.5V, Vin(Min)=4.5V
U3: library part 1, Drawer_id=1, idMCU=1, Manufacturer_id=1, Name="MKE18F512VLH16 MCU"
U4: library part 3, Manufacturer_id=1, Created_By=Kyle, Drawer_id=1, idIC_Interface=3, Link=https://www.digikey.com/product-detail/en/ftdi-future-technology-devices-international-ltd/FT232RL-REEL/768-1007-1-ND/1836402, MfrPartNo=FT232RL, Name="USB FTDI", Protocol=UART, Vin(Max)=5.25, Vin(Min)=3.3

## Free pads (board coordinates)
  round 180 hole 160: 5(2300,5818) 6(6865,5818) 7(6865,1480) 8(2300,1480)

## Via types
v1: diameter 30, hole 15, Top Layer to Bottom Layer, 236 vias
v2: diameter 30, hole 10, Top Layer to Bottom Layer, 3 vias
v3: diameter 40, hole 25, Top Layer to Bottom Layer, 1 vias

## Nets (pads, with @x,y where several pads share a name; then routed paths per layer and width w, separated by ;. In a path a pad name is that pad's centre, name@x,y a point inside that pad or via, vN(x,y) a via of type N, cw(c..) or ccw(c..) an arc to the next point about the centre after c; other vN are vias at no path point)
A0_UART0_CTS: P4.2 U3.50 U4.3 | length 5170.4
  Top Layer w10: U4.3@3875,5680 3871.46,5683.54 3820.01,5683.54 3809.54,5694 3752,5694 3728,5670 3728,5296 3855,5169 4025,5169 4429,4765 v1(4429,4735) ; U3.50@4737.95,4046.38 4738.73,4047.16 4738.73,4104.19 v1(4768.54,4134) 4777.54,4143 4921.18,4143 5229,3835.18 5229,2800 5435.25,2593.75 5435.3,2593.75 5566.05,2463 5863,2463 5882.71,2443.29 5882.71,2345.29 v1(5879.71,2342.29) ; v1(6054.71,2342.29) P4.2@6126.66,2342.29
  Bottom Layer w10: v1(4429,4735) 4435,4735 4447,4747 4508,4747 4768.54,4486.46 v1(4768.54,4134) ; v1(5879.71,2342.29) v1(6054.71,2342.29)
A1_UART0_RTS: P4.1 U3.49 U4.11 | length 4748.7
  Top Layer w10: U4.11@3868,5467 3787,5467 3757,5437 3757,5292.46 3862.46,5187 4052.46,5187 v1(4455.46,4784) ; U3.49@4757.64,4046.38 4757.64,4082.64 4783,4108 v1(4799,4108) 4930.42,4108 5211,3827.42 5211,2788 5426.5,2572.5 ; 5427.48,2571.52 5564.5,2434.5 5849.5,2434.5 v1(5853,2431) ; v1(6053.71,2442.29) P4.1@6126.66,2442.29
  Bottom Layer w10: v1(4455.46,4784) 4508,4784 4799,4493 v1(4799,4108) ; v1(5853,2431) 6042.43,2431 v1(6053.71,2442.29)
A2_UART0_RX: P3.16 R20.2 U3.48 | length 5850.9
  Top Layer w10: v1(2976.87,5617.87) R20.2@3042.23,5617.87 ; v1(4590,5308) v1(4838,5308) ; U3.48@4836.38,3967.64 4883.64,3967.64 4913,3997 4912,3998 v1(4912,4040) 4972.97,4040 5193,3819.97 5193,2772 5482,2483 v1(5482,2437) ; P3.16@5138.54,2439.06 v1(5263,2439.06)
  Bottom Layer w10: v1(2976.87,5617.87) 2976.87,5585.13 3229,5333 3229,5247 3254,5222 3749,5222 3835,5308 v1(4590,5308) ; v1(4838,5308) 4873,5273 4873,4070 4903,4040 v1(4912,4040) ; v1(5263,2439.06) 5479.94,2439.06 v1(5482,2437)
A3_UART0_TX: P3.15 R21.2 U3.47 | length 5421
  Top Layer w10: v1(2979,5517) 3037,5517 R21.2@3038,5518 ; v1(3857,5250) 3902,5205 4074.05,5205 4462.05,4817 v1(4504,4817) ; U3.47@4837.16,3947.17 U3.47@4836.38,3947.95 4915.95,3947.95 v1(4944,3976) ; v1@4945,3977 4946,3976 5011.51,3976 5175,3812.51 5175,2760 5432,2503 v1(5432,2332) ; P3.15@5138.54,2339.06 5139.54,2338.06 v1(5262,2338.06)
  Bottom Layer w10: v1(2979,5517) 2979,5516 2955,5492 2955,5319 3085,5189 3796,5189 v1(3857,5250) ; v1(4504,4817) 4531,4817 4852,4496 4852,4059.01 4935.01,3976 v1(4944,3976) ; v1(5262,2338.06) 5268.06,2332 v1(5432,2332)
A4: P4.16 P6.2 R26.1 U3.64 | length 5848.6
  Top Layer w10: U3.64@4462,4065 4459,4068 4459,4340 4583,4464 5020,4464 5098.5,4385.5 ; P6.2@4813.23,5545 4813.23,5537.71 4880.94,5470 5087,5470 v1(5087,5388) ; 5087,5471 5133,5517 5133,5721 5154,5742 R26.1@5206,5742 ; 5157,4283 5157,4222.4 5450,3929.4 5450,2885.91 5573.91,2762 5947,2762 6118,2591 6348,2591 6428,2511 v1(6428,2444) ; 5157,4284 5157,4327 5098.5,4385.5 ; v1@5157,5057 v1(5159,5059) ; v1@5160,5059 5159,5058 5159,4446 5098.5,4385.5 ; P4.16@6226.66,2442.29 v1(6304.29,2442.29)
  Bottom Layer w10: v1(5087,5388) 5159,5316 v1(5159,5059) ; v1(6304.29,2442.29) 6306,2444 v1(6428,2444)
A5: B1.1 B1.3 C3.2 P4.15 P6.10 R27.1 U3.63 | length 8349.4
  Top Layer w10: C3.2@3053,5421 3053,5264 3298.15,5018.85 B1.3@3298.15,4954 ; B1.1@3298,4752 3551,4499 3551,4498 v1(4294,4498) ; B1.1@3298.15,4757.15 3298.15,4950.15 B1.3@3299,4951 ; U3.63@4482,4059 4482.83,4059 4482.83,4311.83 v1(4494,4323) 4494,4327.14 4594.86,4428 5030.54,4428 5139,4319.54 5139,4212 5432,3919 5432,2878.46 5567.46,2743 5937,2743 6111,2569 6314,2569 6400,2483 v1(6400,2342) ; P6.10@4813.23,5745 4728,5745 4628,5645 v1(4628,5476) 4628,5398 4679.02,5346.98 R27.1@5205.81,5346.98 ; P4.15@6226.66,2342.29 v1(6303.71,2342.29)
  Bottom Layer w10: v1(4494,4323) 4494,4339 4335,4498 v1(4294,4498) 4294,4773 4628,5107 v1(4628,5476) ; v1(6303.71,2342.29) 6304,2342 v1(6400,2342)
A6_UART1_CTS: P3.6 U3.38 | length 2246.9
  Top Layer w10: U3.38@4836.38,3770.79 4914.61,3770.79 5084,3601.4 5084,2742 4939,2597 v1(4939,2528) ; v1@4864,1939.06 P3.6@5038.54,1939.06
  Bottom Layer w10: v1(4864,1938) 4939,2013 v1(4939,2528)
A7_UART1_RTS: P3.5 U3.37 | length 2099.1
  Top Layer w10: U3.37@4836.38,3751.1 4899.72,3751.1 5066,3584.82 5066,2751 4911,2596 v1(4911,2474) ; v1(4866,2040) 5037.61,2040 P3.5@5038.54,2039.06
  Bottom Layer w10: v1(4866,2040) 4911,2085 v1(4911,2474)
A10: P4.10 P6.6 U3.58 | length 6269.3
  Top Layer w10: U3.58@4579.69,4068 4581.25,4068 4581.25,4206.25 v1(4663,4288) 4708,4333 4992.54,4333 5046,4279.54 5046,4175 5342,3879 5342,2840.46 5589.46,2593 v1(5792,2593) v1@5801,2593 ; v1(4701,5469) 4701,5605 4741,5645 P6.6@4813.23,5645 ; v1(5803,2350) 5803,1890.54 6052.54,1641 6322,1641 6387,1706 6387,1785.57 6330.29,1842.29 P4.10@6226.66,1842.29
  Bottom Layer w10: v1(4663,4288) 4373,4578 4373,4761.54 4779,5167.54 4779,5416.6 4726.6,5469 v1(4701,5469) ; v1@5790,2593 5790,2564.4 5803,2551.4 v1(5803,2350)
A11: P4.9 U3.57 | length 3996.1
  Top Layer w10: U3.57@4600,4066 4600.94,4066.94 4600.94,4181.85 4727.09,4308 4987,4308 5026,4269 5026,4169 5320,3875 5320,2837 5593,2564 5826,2564 v1(5828,2566) ; v1(5839,2379) 5839,1880 6058,1661 6155,1661 6226.66,1732.66 P4.9@6226.66,1742.29
  Bottom Layer w10: v1(5828,2566) 5825,2563 5825,2411 5839,2397 v1(5839,2379)
A12_CAN1_RX: P4.8 U2.4 U3.56 | length 4654.1
  Top Layer w10: U3.56@4619.84,4046.38 4619.84,4175.3 4726.54,4282 4948.83,4282 v2(4959,4271.83) ; v1(5250,4257) 5856.92,4254.08 5863.52,4254.08 6185.02,3932.57 6185.02,3927.98 6187,3926 6187,3569 6241,3515 6241,3432 ; v1(6056,2514) 6024.29,2482.29 6024.29,1764.71 6047,1742 6126.38,1742 P4.8@6126.66,1742.29 ; v1(6142,2626) 6142,2659.28 6186,2703.28 6186,3377 6241,3432 ; v1(6363,3432) 6241,3432 ; U2.4@6557,3484.72 6559,3482.72 v1(6559,3420)
  Bottom Layer w10: v2@4968,4272 4983,4257 v1(5250,4257) ; v1(6056,2514) 6056,2540 v1(6142,2626) ; v1(6363,3432) 6547,3432 v1(6559,3420)
A13_CAN1_TX: P4.7 U2.1 U3.55 | length 4350.5
  Top Layer w10: U3.55@4639.53,4046.38 4639.53,4169.53 4718,4248 v2(4903,4248) ; v1(5196,4223) 5864.54,4223 6163.77,3923.77 6164.04,3502.04 6164,3502 6164,2710 v1(6108,2654) ; v1(5992,1843) 5992,1885 6006,1899 6006,2526 v1(6020,2540) ; v1(6054,1842.29) P4.7@6126.66,1842.29 ; 6164.04,3496 6192.98,3495.98 v1(6206.25,3482.72) ; v1(6324.72,3482.72) 6405,3482.72 U2.1@6407,3484.72
  Bottom Layer w10: v2(4903,4248) 4941,4248 4966,4223 v1(5196,4223) ; v1(5992,1843) 6053.29,1843 v1(6054,1842.29) ; v1(6020,2540) 6020,2566 v1(6108,2654) ; v1(6206.25,3482.72) v1(6324.72,3482.72)
B0_SPI0_PCS0: P3.2 U3.34 | length 1799.2
  Top Layer w10: v1(4799,2340) 5031.48,2340 5035.48,2336 P3.2@5038.54,2339.06 P3.2@5027.61,2350 ; v1(4809,2504) 4809,2574 5012,2777 5012,3562.46 4883.19,3691.27 4836.38,3691.27 U3.34@4836.38,3692.05
  Bottom Layer w10: v1(4799,2340) 4810,2351 4809,2352 v1(4809,2504)
B1_SPI0_SOUT: P3.1 U3.33 | length 1650.1
  Top Layer w10: U3.33@4836.38,3672.36 4876.64,3672.36 4994,3555 4994,2785 4781,2572 4781,2477 4818.94,2439.06 P3.1@5038.54,2439.06 P3.1@5035.48,2436
B2_SPI0_SCK: P2.16 U3.32 | length 1944.9
  Top Layer w10: P2.16@4055.06,2433.96 4615.96,2433.96 4973,2791 4973,3366 U3.32@4758,3581
B3_SPI0_SIN: P2.15 U3.31 | length 2001.4
  Top Layer w10: P2.15@4055.06,2333.96 4544.96,2333.96 4732,2521 v1(4753,2521) ; U3.31@4738,3573 4738.73,3573 4738.73,3561.66 4746.35,3554.05 4746.35,3553.65 4955,3345 4955,2822 v1(4761,2628)
  Bottom Layer w10: v1(4753,2521) 4753,2620 v1(4761,2628)
B4_SPI0_SOUT: P2.3 U3.19 | length 2000.1
  Top Layer w10: P2.3@3955.06,2233.96 3792.04,2233.96 3765,2261 3765,2428.6 4307.4,2971 4338,2971 v1(4338,2977) ; v1(4459,2939) 4459,2973 4502,3016 4502,3262 4480,3284 4480,3530.6 4501.73,3552.33 U3.19@4501.73,3593.62 U3.19@4501.5,3593.39
  Bottom Layer w10: v1(4338,2977) 4417,2977 4455,2939 v1(4459,2939)
B5_SPI0_PCS1: P2.2 U3.18 | length 1803.2
  Top Layer w10: P2.2@3955.06,2333.96 3801.04,2333.96 3787,2348 3787,2407 4318,2938 v1(4318,2942) ; v1(4395,2926) 4395,2939 4484,3028 4484,3253 4462,3275 4462,3538.05 4482.05,3558.1 U3.18@4482.05,3593.62
  Bottom Layer w10: v1(4318,2942) 4318,2932 4316,2930 4320,2926 v1(4395,2926)
B6_I2C0_SDA: P1.12 U3.12 | length 2674.7
  Top Layer w10: P1.12@3005,2039 3006,2038 v1(3119,2038) ; v1(3539,2039) 3539,2418.46 3560.54,2440 3560.72,2440 4166,3045.28 4166,3662 4255.1,3751.1 U3.12@4383.62,3751.1
  Bottom Layer w10: v1(3119,2038) 3122,2035 3126,2039 v1(3539,2039)
B7_I2C0_SCL: P1.11 U3.11 | length 2801.7
  Top Layer w10: P1.11@2998.53,1932.09 v1(3119.09,1932.09) ; v1(3508,1932) 3508,2412.91 3553.09,2458 3553.27,2458 4147,3051.73 4147,3679 4238.79,3770.79 U3.11@4383.62,3770.79
  Bottom Layer w10: v1(3119.09,1932.09) 3119.18,1932 v1@3503.09,1932 ; v1@3499.09,1928 v1@3503.09,1932 ; v1@3503,1932.09 v1@3503.09,1932 ; v1(3508,1932) v1@3503.09,1932
B12_ADC1_7_H: P3.11 R7.2 | length 5071.4
  Top Layer w10: v1(3230,4102) 3289.05,4042.95 3289.05,3776.4 3289,3776.35 3289,3335 3337,3287 v1(3337,3266) ; P3.11@5138.54,1939.06 v1(5262.94,1939.06)
  Bottom Layer w10: R7.2@2660.95,4068.86 2660.95,4095.95 2697,4132 3200,4132 v1(3230,4102) ; v1(3337,3266) 3337,3145 3391,3091 3806.19,3091 4350,2547.19 4350,1896.46 4624.46,1622 5285.46,1622 5328,1664.54 5328,1874 v1(5262.94,1939.06)
B12_ADC1_7_M: D5.2@2615.57,3989.26 R7.1 U3.43 | length 3746.3
  Top Layer w10: v1(3661,3300) 3661,3579 3682,3600 v1(3682,3646) ; U3.43@4836.38,3869.21 5001.39,3869.21 5046,3824.6 v1(5046,3800)
  Bottom Layer w10: D5.2@2616,3993 2615.67,3993.33 R7.1@2615.67,4068.86 2615.67,4094.67 2674,4153 3221,4153 3682,3692 v1(3682,3646) ; v1(3661,3300) 3686,3300 3711,3325 4753,3325 4886,3458 4886,3610.09 5046,3770.09 v1(5046,3800) 5045,3800 v1@5038,3793
B13_ADC1_8_H: P3.10 R15.2 | length 4174.2
  Top Layer w10: P3.10@5138.54,1839.06 v1(5265.94,1839.06)
  Bottom Layer w10: R15.2@2657,3273 2708,3324 3362,3324 3397,3289 3397,3123 3411,3109 3813.65,3109 4371,2551.65 4371,1904 4635,1640 5278,1640 5310,1672 5310,1795 v1(5265.94,1839.06)
B13_ADC1_8_M: D4.2 R15.1 U3.42 | length 3012.4
  Top Layer w10: U3.42@4836.38,3849.53 4979.47,3849.53 5003,3826 v1(5005,3826)
  Bottom Layer w10: D4.2@2614,3190 2615.03,3191.03 R15.1@2615.03,3270.42 ; R15.1@2615,3273 2615,3280 2680,3345 4746,3345 4868,3467 4868,3617.54 5005,3754.54 v1(5005,3826)
C0_ADC0_8_H: P2.10 R13.2 | length 2661.3
  Top Layer w10: v1(3125,3406) 3125,3392.56 3140,3377.56 v1(3140,3221) ; P2.10@4055.06,1833.96 v1(4185.96,1833.96)
  Bottom Layer w10: R13.2@3004,3438 3004,3405 3005,3406 v1(3125,3406) ; v1(3140,3221) 3152,3209 3152,3086 3206,3032 3321,3032 3352,3001 3768.91,3001 4247,2522.91 4247,1891 4189.96,1833.96 v1(4185.96,1833.96)
C0_ADC0_8_M: D15.2 R13.1 U3.26 | length 1896.1
  Top Layer w10: U3.26@4639.53,3593.62 4639.53,3510.47 4676,3474 4676,3451 v1(4662,3437)
  Bottom Layer w10: D15.2@3047.53,3504.81 3458.19,3504.81 3503,3460 3611,3460 3640,3431 4662,3431 v1(4662,3437) ; D15.2@3049,3504 3050.28,3502.72 R13.1@3050.28,3437
C1_ADC0_9_H: P2.9 R10.2 | length 3036.6
  Top Layer w10: v1(3102,3694) 3102,3693 3172.5,3622.5 3172.5,3284.5 3172,3284 v1(3172,3274) ; P2.9@4055.06,1733.96 v1(4153.96,1733.96)
  Bottom Layer w10: R10.2@3004,3660 3004,3683 3015,3694 v1@3101,3694 ; v1(3172,3274) 3172,3263 3160,3251 3160,3241 3159.8,3240.8 3174,3226.6 3174,3089.46 3213.46,3050 3328.46,3050 3359.46,3019 3776.37,3019 4269,2526.37 4269,1849 v1(4153.96,1733.96)
C1_ADC0_9_M: D15.1 R10.1 U3.25 | length 1855.9
  Top Layer w10: U3.25@4620,3593.46 U3.25@4619.84,3593.62 4619.84,3532.21 4620,3532.05 4620,3484 4633,3471 v1(4633,3468)
  Bottom Layer w10: R10.1@3049,3658 3047.53,3656.53 D15.1@3047.53,3579.62 3412.38,3579.62 ; 3412,3580 3412.38,3579.62 ; v1(4633,3468) 4554.7,3468 4538.6,3451.9 3657.1,3451.9 3629,3480 3512,3480 3412.38,3579.62
C2_ADC0_10_H: P2.5 R9.2 | length 4139
  Top Layer w10: v1(3185,3808) 3202,3791 3202,3286 3209,3279 v1(3209,3239) ; v1(3858,2033) 3858.96,2033.96 P2.5@3955.06,2033.96
  Bottom Layer w10: R9.2@3004,3829 3004,3803 3008,3799 3176,3799 v1(3185,3808) ; v1(3209,3239) 3209,3131 3265,3075 3328.91,3075 3366.91,3037 3783.82,3037 4290,2530.82 4290,1825 4084,1619 3772,1619 3707,1684 3707,1882 v1(3858,2033)
C2_ADC0_10_M: D13.2 R9.1 U3.21 | length 1930.4
  Top Layer w10: v1@3322,3701 v1(3322,3704) v1(3322,3793) ; v1(4527,3479.9) 4541.1,3494 U3.21@4541.1,3593.62
  Bottom Layer w10: D13.2@3046,3916 D13.2@3047.53,3914.45 ; R9.1@3047.8,3828.86 3047.8,3914.2 D13.2@3047.53,3914.45 ; v1(3322,3704) 3322,3703 3526,3499 3640,3499 3667,3472 4519.1,3472 v1(4527,3479.9) ; v1(3322,3793) 3322,3795 3202.55,3914.45 D13.2@3047.53,3914.45
C3_ADC0_11_H: P2.4 R8.2 | length 4576.2
  Top Layer w10: v1(3182,4049) 3184,4049 3224,4009 3224,3304 v1(3247,3281) ; v1(3861.04,2133.96) P2.4@3955.06,2133.96
  Bottom Layer w10: R8.2@3002.52,4068.86 3002.52,4097.52 3017,4112 3119,4112 v1(3182,4049) ; v1(3247,3281) 3247,3134 3288,3093 3336.37,3093 3374.37,3055 3791.28,3055 4310,2536.28 4310,1819.54 4091.46,1601 3764.54,1601 3689,1676.54 3689,1892 3811,2014 3811,2083.93 v1(3861.04,2133.96)
C3_ADC0_11_M: D13.1 R8.1 U3.20 | length 1910.3
  Top Layer w10: v1(3356,3827) 3387,3796 v1(3387,3703) ; v1(4509,3520) 4521.42,3532.42 U3.20@4521.42,3593.62 U3.20@4522,3593.04
  Bottom Layer w10: R8.1@3047,4068 3047.53,4067.47 D13.1@3047.53,3989.26 3193.74,3989.26 v1(3356,3827) ; v1(3387,3703) 3387,3672 3542,3517 3661,3517 3684,3494 4486,3494 4486,3497 v1(4509,3520)
C4: P4.14 P6.4 U3.62 | length 5570.9
  Top Layer w10: U3.62@4500.95,4061 4500.95,4285.95 v1@4552.73,4337.73 ; v1(4556.46,4350) 4564.46,4358 4566,4358 4618,4410 5021,4410 5121,4310 5121,4203 5414,3910 5414,2871 5560,2725 5925,2725 6105,2545 6301,2545 6372,2474 6372,2243.29 v1(6373,2242.29) ; v1(4741,5404) 4750,5404 4746,5408 4746,5590 4751,5595 P6.4@4813.23,5595 ; P4.14@6226.66,2242.29 v1(6308.29,2242.29)
  Bottom Layer w10: v1(4556.46,4350) 4334,4572.46 4334,4748 4741,5155 v1(4741,5404) ; v1(6308.29,2242.29) v1(6373,2242.29)